# Altium PCB PCB1.PcbDoc
Units mm, origin at the board's own origin, x right, y up, seen from the top; angles counter-clockwise.
Board outline 152.4 x 101.6 mm, 2 copper layers (Top Layer, Bottom Layer); 15 components, 10 nets, 38 pads, 0 vias.
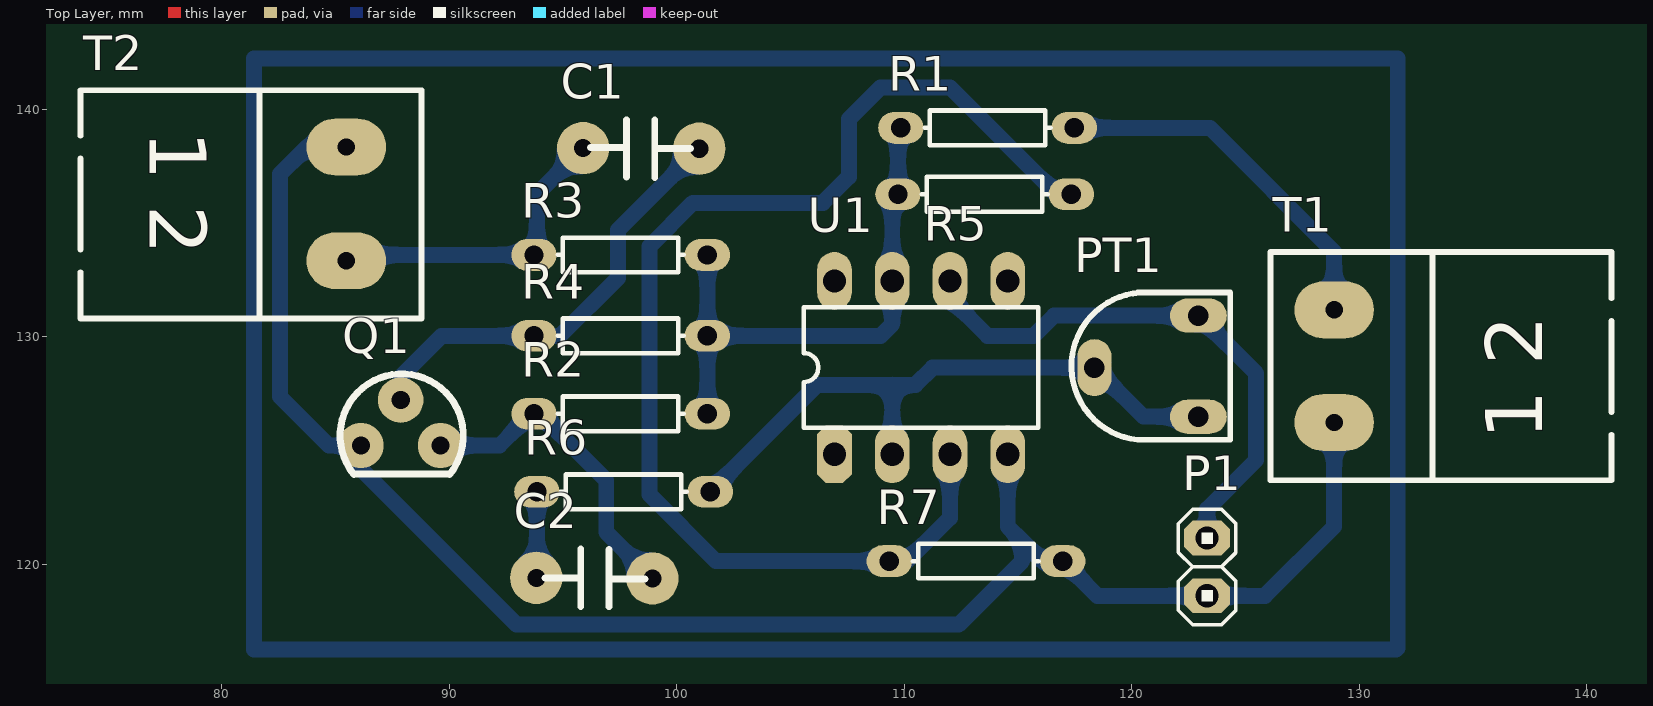
[diagram p0: Top Layer view]
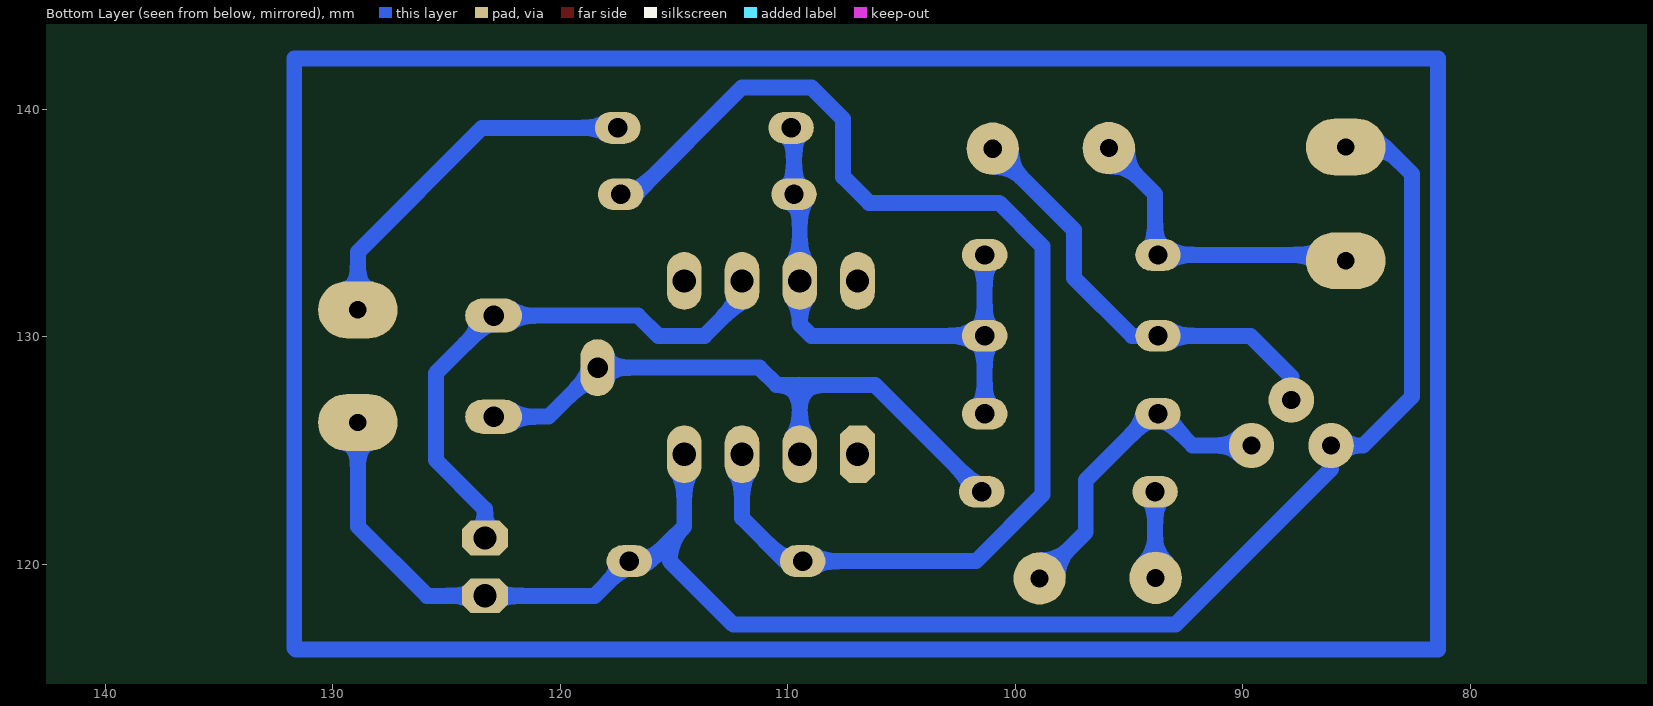
[diagram p1: Bottom Layer view, seen from below]

## Layer stack, top to bottom
Top Solder: solder mask 0.0102, Solder Resist, Dk 3.5
Top Layer: signal copper 0.0356
Dielectric 1: dielectric 0.32, FR-4, Dk 4.8
Bottom Layer: signal copper 0.0356
Bottom Solder: solder mask 0.0102, Solder Resist, Dk 3.5

## Board outline
17.526,42.799 169.926,42.799 169.926,144.399 17.526,144.399

## Design rules (kind name [scope] priority, off if disabled: settings)
Clearance [All] p1: gap=0.254
PolygonConnect [All] p1: connectstyle=Relief reliefconductorwidth=0.254 reliefentries=4 polygonreliefangle="90 Angle" airgapwidth=0.254
RoutingLayers [All] p1: top layer_v5=FALSE bottom layer_v5=TRUE
RoutingVias [All] p1: holewidth=0.711 width=1.27 viastyle="Through Hole" minholewidth=0.711 minwidth=1.27 maxholewidth=0.711 maxwidth=1.27
SolderMaskExpansion [All] p1: expansion=0.102
Width [All] p1: maxlimit=0.7 minlimit=0.7 preferedwidth=0.7
29 further rules are at their usual default settings.

## Components (designator, comment, footprint, x,y, rotation, side; value= is the part's Value field where it differs from the comment)
C1 "1uF" RAD_ADA 95.885,138.303 r0 top
C2 "1uF" RAD_ADA 98.933,119.38 r180 top
P1 "Header 2" My_1X02 123.317,118.618 r270 top
PT1 "POT3" POT3 124.333,125.476 r90 top locked
Q1 "Bc238" T4-TO92 86.614,125.476 r90 top
R1 "Res1" AXIAL-0.3 113.665,139.192 r180 top
R2 "Res1" AXIAL-0.3 97.536,126.619 r0 top
R3 "Res1" AXIAL-0.3 97.536,133.604 r0 top
R4 "Res1" AXIAL-0.3 97.536,130.048 r0 top
R5 "Res1" AXIAL-0.3 113.538,136.271 r180 top
R6 "Res1" AXIAL-0.3 97.663,123.19 r180 top
R7 "Res1" AXIAL-0.3 113.157,120.142 r180 top
T1 "Phoenix terminal" "phoenix terminal 2"#1 141.097,123.698 r90 top
T2 "Phoenix terminal" "phoenix terminal 2"#2 73.787,140.843 r270 top
U1 "ua741" My_8P3 110.744,128.651 r0 top

## Footprints (in the part's own frame and the unit in brackets; to place one, negate y for a bottom-side part, rotate by r counter-clockwise, add the part's x,y. Pads: shape width x height; smd on the part's side, far side on the other; paste and mask are expansions set on the pad)
AXIAL-0.3 [mm] "Axial Device, Thru-Hole; 2 Leads; 0.3 in Pin Spacing"
  oval 2x1.4 hole 0.85: 1(-3.81,0) 2(3.81,0)
  silkscreen extent -2.77,-0.76 2.77,0.76
My_1X02 [mil]
  oct 60x80 hole 40: 1(-100,0) 2(0,0)
  silkscreen extent -150,-50 50,50
My_8P3 [mil]
  oct 60x100 hole 40: 1(-150,-150)
  oval 60x100 hole 40: 2(-50,-150) 3(50,-150) 4(150,-150) 5(150,150) 6(50,150) 7(-50,150) 8(-150,150)
  silkscreen extent -203,-104 203,104
"phoenix terminal 2"#1 [mil] "2 terminals"
  oval 98.43x137.8 hole 30: 1(295,480) 2(100,480)
  silkscreen extent 0,0 395,591
"phoenix terminal 2"#2 [mil] "2 terminals"
  oval 98.43x137.8 hole 30: 1(98.15,460) 2(295,460)
  silkscreen extent 0,0 395,591
POT3 [mm]
  oval 1.5x2.5 hole 0.9: 1(1.016,1.397) 2(5.461,1.397)
  oval 2.5x1.5 hole 0.9: 3(3.175,5.969)
  silkscreen extent 0,0 6.48,6.98
RAD_ADA [mm]
  round 2.3 hole 0.8: 1(0,0) 2(5.105,-0.026)
  silkscreen extent 0.33,-1.3 4.72,1.24
T4-TO92 [mm]
  round 2 hole 0.8: B(1.75,-1.25) C(-0.25,-3) E(-0.25,0.5)
  silkscreen extent -1.52,-4 2.89,1.41

## Part data
C1 C2: library part CAP
P1: "Header, 2-Pin"
PT1: "Variable Potentiometer top adjust"
Q1: library part 2N2222, "NPN"
R1 R2 R3 R4 R5 R6 R7: "Resistor"
T1 T2: library part "Phoenix terminal 2", "Terminal 2 Pin"
U1: library part ATtiny11-6PI, "AVR 1K Byte of Flash Memory"

## Nets (pads, with @x,y where several pads share a name; then routed paths per layer and width w, separated by ;. In a path a pad name is that pad's centre, name@x,y a point inside that pad or via, vN(x,y) a via of type N, cw(c..) or ccw(c..) an arc to the next point about the centre after c; other vN are vias at no path point)
GND: P1.2 Q1.E R7.1 T1.2 T2.1 U1.4 | length 77.3
  Bottom Layer w0.7: T2.1 83.74,138.35 82.55,137.16 82.55,127.381 84.705,125.226 Q1.E 86.114,124.198 92.964,117.348 112.395,117.348 115.189,120.142 115.189,121.031 ; U1.4 114.554,121.666 115.189,121.031 ; T1.2 128.905,121.666 125.857,118.618 P1.2 118.491,118.618 R7.1 116.078,120.142 115.189,121.031
NetC1_1: C1.1 R3.1 T2.2 | length 14
  Bottom Layer w0.7: T2.2 85.725,133.604 R3.1 93.853,133.731 93.853,136.271 C1.1
NetC1_2: C1.2 Q1.B R4.1 | length 19.5
  Bottom Layer w0.7: Q1.B 87.864,128.25 89.662,130.048 R4.1 94.869,130.048 97.409,132.588 97.409,134.696 C1.2
NetC2_1: C2.1 Q1.C R2.1 | length 13.9
  Bottom Layer w0.7: Q1.C 92.206,125.226 R2.1@93.472,126.492 ; R2.1 93.98,126.619 96.901,123.698 96.901,121.412 C2.1
NetC2_2: C2.2 R6.2 | length 3.8
  Bottom Layer w0.7: C2.2 93.853,119.431 R6.2
NetP1_1: P1.1 PT1.2 U1.6 | length 24.5
  Bottom Layer w0.7: U1.6 112.014,131.699 113.665,130.048 115.697,130.048 116.586,130.937 PT1.2 125.476,128.397 125.476,124.587 123.317,122.428 P1.1
NetPT1_1: PT1.1 PT1.3 R6.1 U1.2 | length 27.7
  Bottom Layer w0.7: R6.1 106.172,127.889 109.474,127.889 ; U1.2 109.474,127.889 ; PT1.1 120.523,126.492 PT1.3 111.252,128.651 110.49,127.889 109.474,127.889
NetR1_2: R1.2 R2.2 R3.2 R4.2 R5.2 U1.7 | length 24.1
  Bottom Layer w0.7: R2.2 R4.2 ; R3.2 R4.2 ; R1.2 109.728,139.065 R5.2 109.474,136.017 U1.7 109.474,130.556 108.966,130.048 R4.2
NetR5_1: R5.1 R7.2 U1.3 | length 53.8
  Bottom Layer w0.7: U1.3 112.014,122.047 110.109,120.142 R7.2 101.727,120.142 98.806,123.063 98.806,133.985 100.711,135.89 106.426,135.89 107.569,137.033 107.569,139.573 108.966,140.97 112.014,140.97 116.713,136.271 R5.1
VCC: R1.1 T1.1 | length 16.2
  Bottom Layer w0.7: R1.1 123.444,139.192 128.905,133.731 T1.1
pads on no net: U1.1 U1.5 U1.8
copper on no net: | length 152.5
  Bottom Layer w0.7: 81.407,116.259 81.407,119.253 81.407,142.24 131.699,142.24 131.699,116.332 131.626,116.259 81.407,116.259

## Text inside footprints (layer, text, board x,y; h text height)
T1: Top Overlay "1 2" at 138.049,125.476 h2.5 r90
T2: Top Overlay "1 2" at 76.835,139.065 h2.5 r270